# Altium PCB ZAS_SYM_PCB.PcbDoc
Units mil, origin at the board's own origin, x right, y up, seen from the top; angles counter-clockwise.
Board outline 2380 x 1505 mil, 2 copper layers (Top Layer, Bottom Layer); 24 components, 10 nets, 56 pads, 0 vias.
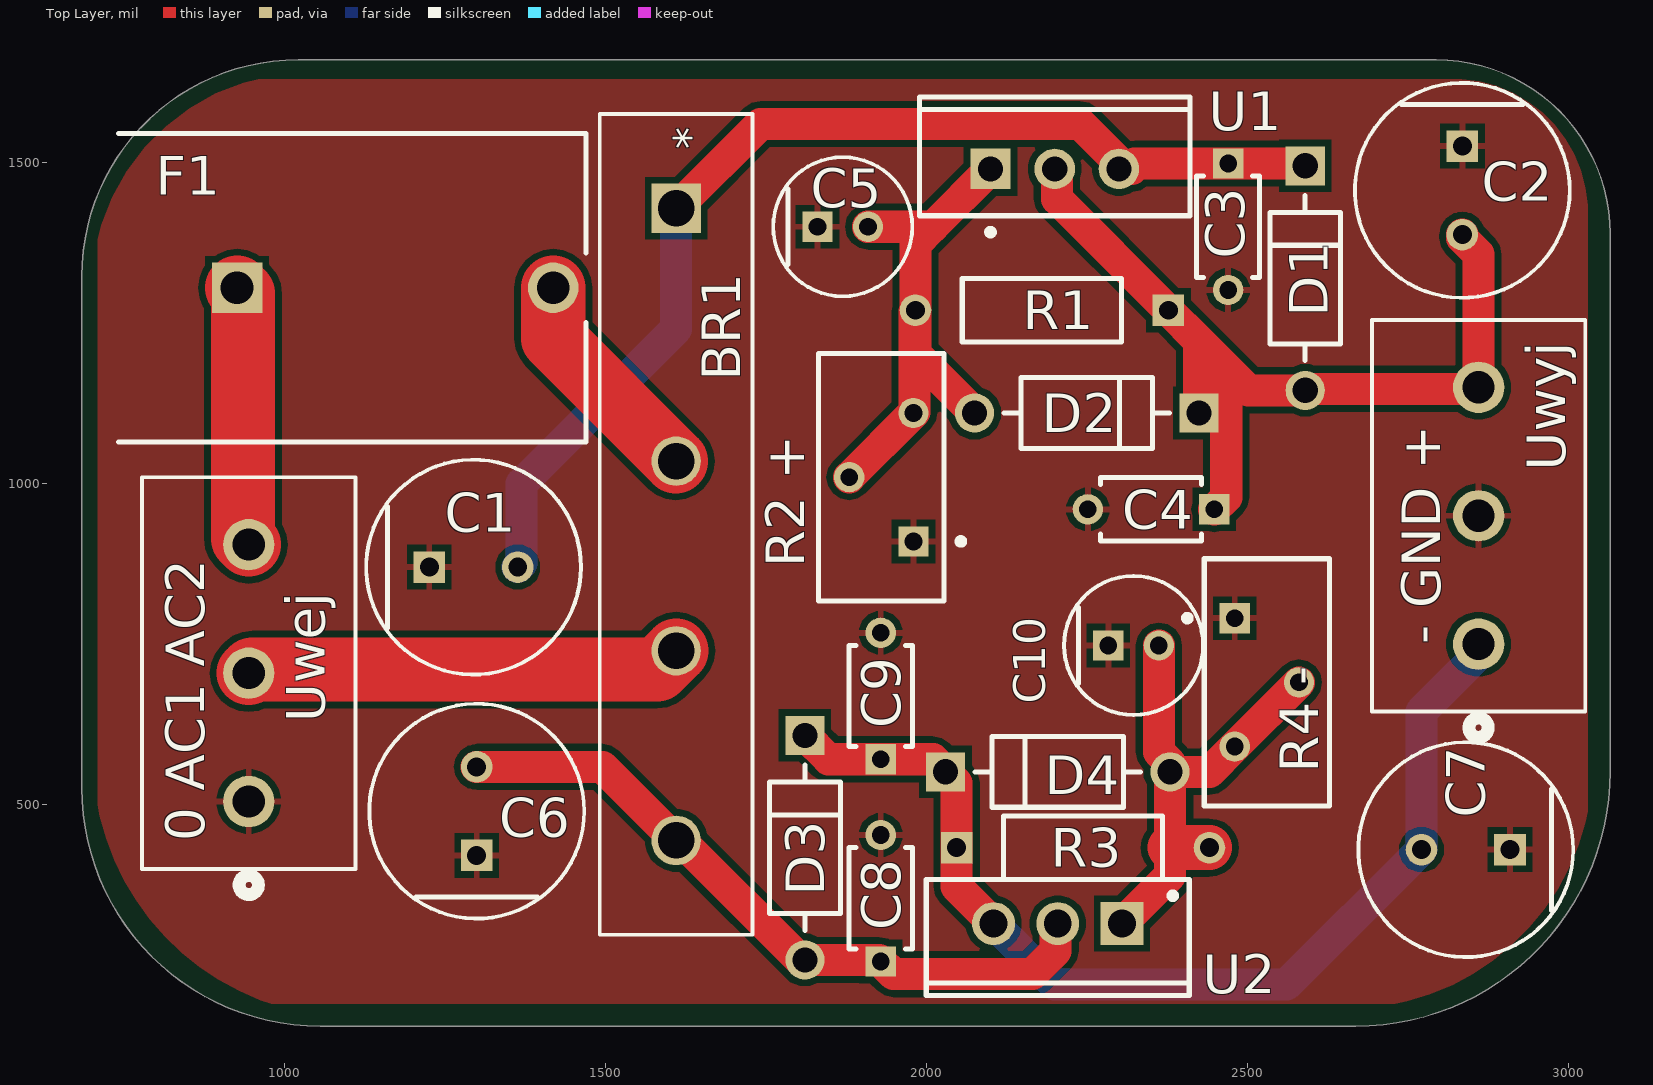
[diagram p0: Top Layer view]
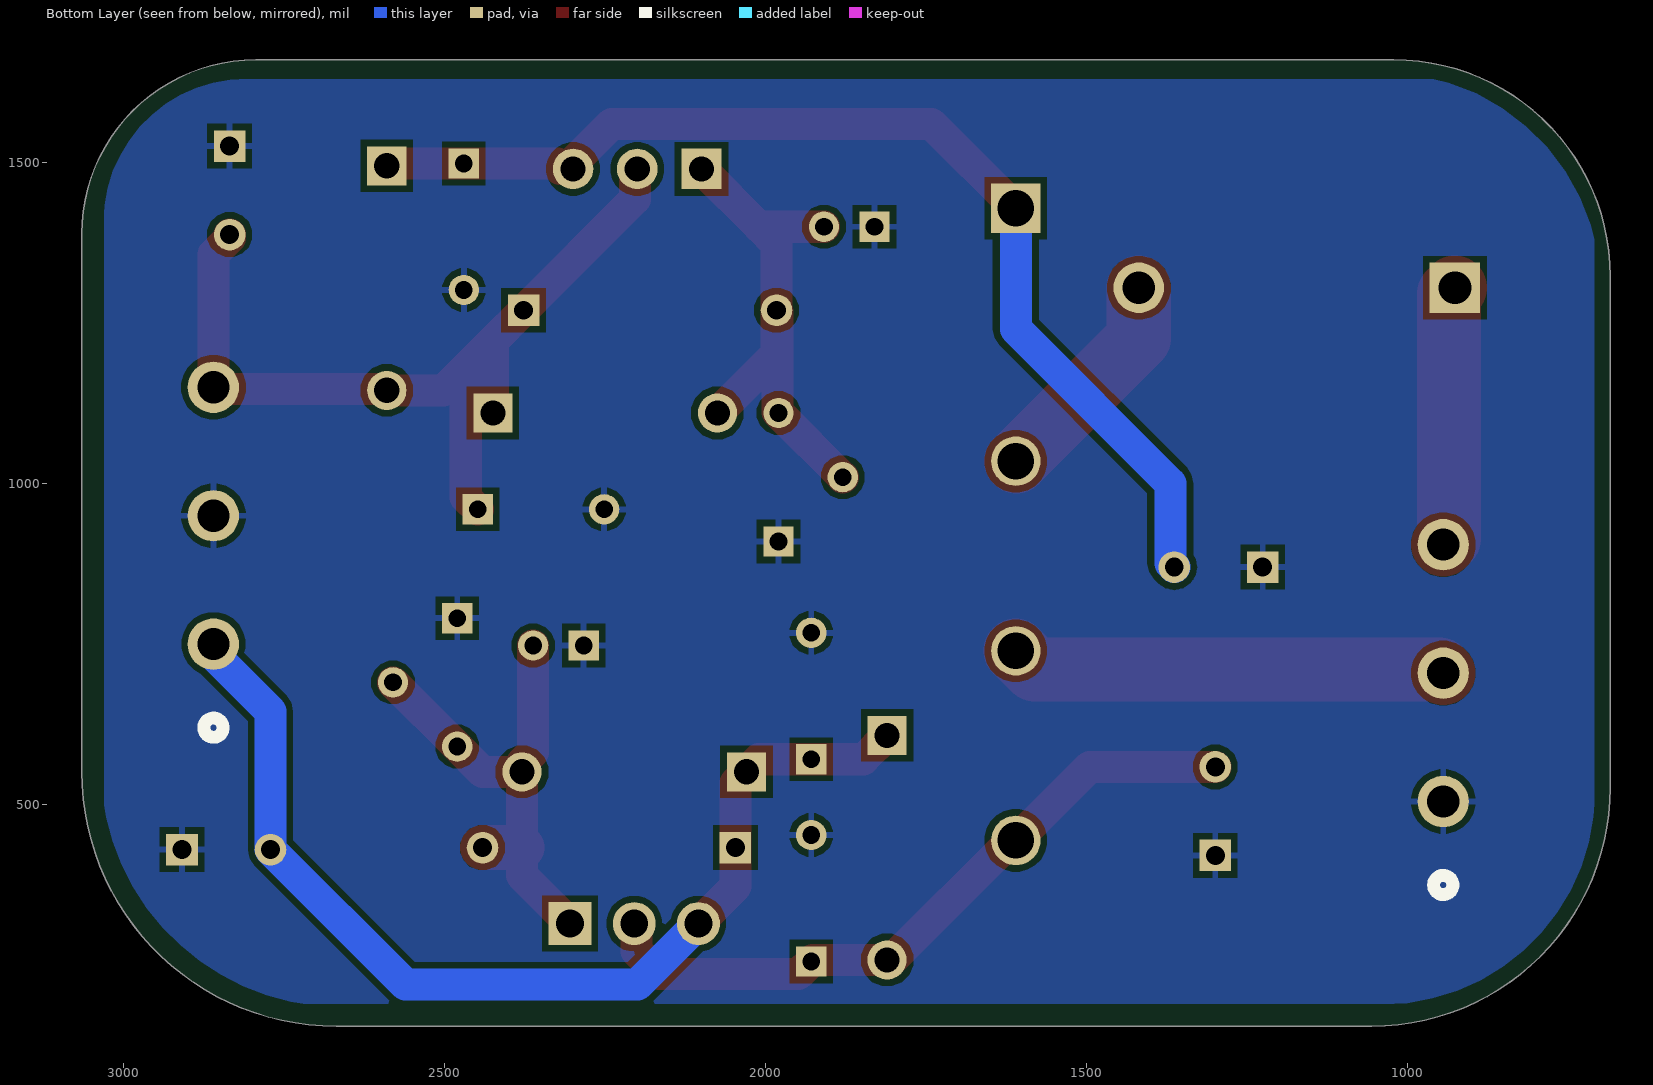
[diagram p1: Bottom Layer view, seen from below]
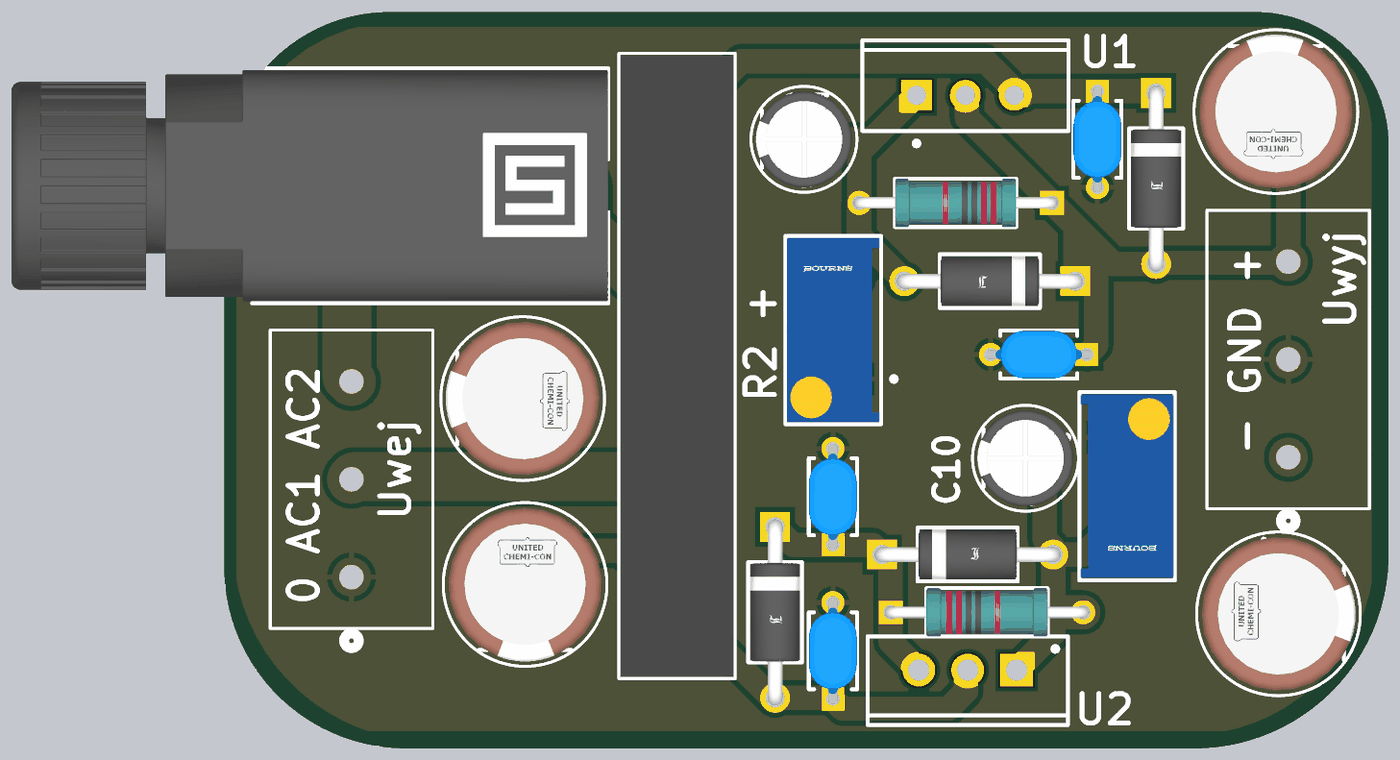
[diagram p2: 3D render of the assembled board from above, using the file's embedded part models]

## Layer stack, top to bottom
Top Solder: solder mask 0.4, Solder Resist, Dk 3.5
Top Layer: signal copper 1.4
Dielectric 1: dielectric 12.6, FR-4, Dk 4.8
Bottom Layer: signal copper 1.4
Bottom Solder: solder mask 0.4, Solder Resist, Dk 3.5

## Board outline
685,526.49 685,1323.09 cw(c1021.91,1323.09) 1021.91,1660 2793.87,1660 cw(c2793.87,1388.87) 3065,1388.87 3065,551.55 cw(c2668.45,551.55) 2668.45,155 1056.49,155 cw(c1056.49,526.49)

## Design rules (kind name [scope] priority, off if disabled: settings)
Clearance [All] p1: gap=10 ignorepadtopadclearanceinfootprint=FALSE
PolygonConnect [All] p1: connectstyle=Relief reliefconductorwidth=10 reliefentries=4 polygonreliefangle="90 Angle" airgapwidth=10
RoutingVias [All] p1: holewidth=28 width=50 viastyle="Through Hole" minholewidth=28 minwidth=50 maxholewidth=28 maxwidth=50
SolderMaskExpansion [All] p1: expansion=4 istentingtop=FALSE
Width [All] p1: maxlimit=10 minlimit=10 preferedwidth=10
30 further rules are at their usual default settings.

## Components (designator, comment, footprint, x,y, rotation, side; value= is the part's Value field where it differs from the comment)
BR1 "GBI10A" BxxC5000-3000ABxxC5000-3300A_DTC 1610.55,1428.7 r270 top
C1 "220uF" FP-KZN-H15-MFG 1295,870 r0 top
C2 "220uF" FP-KZN-H15-MFG 2834.65,1456.69 r270 top
C3 "100nF" FP-RDE0M1-MFG 2470,1400 r270 top
C4 "100nF" FP-RDE0M1-MFG 2350,960 r180 top
C5 "10uF" FP-RAD-TH-D_5_0_5-L_11_1-MFG 1870,1400 r0 top
C6 "220uF" FP-KZN-H15-MFG 1300,490 r90 top
C7 "220uF" FP-KZN-H15-MFG 2840,430 r180 top
C8 "100nF" FP-RDE0M1-MFG 1929.13,354.33 r90 top
C9 "100nF" FP-RDE0M1-MFG 1929.13,669.29 r90 top
C10 "10uF" FP-RAD-TH-D_5_0_5-L_11_1-MFG 2322.83,748.03 r0 top
D1 "1N4007" FP-1N4007-MFG 2590,1320 r270 top value=15pF
D2 "1N4007" FP-1N4007-MFG 2250,1110 r180 top value=15pF
D3 "1N4007" FP-1N4007-MFG 1811.02,433.07 r270 top value=15pF
D4 "1N4007" FP-1N4007-MFG 2204.72,551.18 r0 top value=15pF
F1 "0031.3501" FP-0031_3501-MFG 860,1305 r0 top
R1 "120" FP-MBB0207-MFG 2180,1270 r180 top
"R2 +" "2k" FP-3296Y-MFG 1929.8,1010 r0 top (schematic designator R2)
R3 "120" FP-MBB0207-MFG 2244.09,433.07 r0 top
"R4 -" "2k" FP-3296Y-MFG 2530.51,690.55 r180 top (schematic designator R4)
U1 "LM317" NDE0003A 2200,1490 r0 top
U2 "LM337" TO220 2204.72,314.96 r180 top
Uwej "282837-3" 282837-3_TYC 945,505 r90 top
Uwyj "282837-3" 282837-3_TYC 2860,750 r90 top

## Footprints (in the part's own frame and the unit in brackets; to place one, negate y for a bottom-side part, rotate by r counter-clockwise, add the part's x,y. Pads: shape width x height; smd on the part's side, far side on the other; paste and mask are expansions set on the pad)
282837-3_TYC [mil]
  round 80 / inner round 60 / far side round 80 hole 50 paste-99999 mask-40: 1(0,0) 2(200,0) 3(400,0)
  silkscreen extent -145,-166 505,166
BxxC5000-3000ABxxC5000-3300A_DTC [mil]
  rect 77x77 / inner round 60 / far side rect 77x77 hole 57 paste-99999 mask+0: 1(0,0)
  round 77 / inner round 60 / far side round 77 hole 57 paste-99999 mask+0: 2(393.7,0) 3(688.98,0) 4(984.25,0)
  silkscreen extent -147,-119 1131,119, body extent -142,-114 1126,114, height 677
FP-1N4007-MFG [mm]
  rect 1.55x1.55 hole 1 paste-2539.97 mask+0: 1(-4.44,0)
  round 1.55 hole 1 paste-2539.97 mask+0: 2(4.44,0)
  silkscreen extent -3.26,-1.4 3.26,1.4, body extent -5.32,-1.5 5.32,1.5, height 0.25
FP-0031_3501-MFG [mm]
  rect 2x2 hole 1.3 paste-2539.97 mask+0: 1(1.7,0)
  round 2 hole 1.3 paste-2539.97 mask+0: 2(14.2,0)
  silkscreen extent -3,-6.1 15.5,6.1, body extent -15.6,-6.2 15.6,6.2, height 0.25
FP-3296Y-MFG [mm]
  rect 1.2x1.2 hole 0.7 paste-2539.97 mask+0: 1(1.275,-2.54)
  round 1.2 hole 0.7 paste-2539.97 mask+0: 2(-1.265,0) 3(1.275,2.54)
  silkscreen extent -2.48,-4.89 3.27,4.89, body extent -2.58,-4.99 2.58,4.99, height 0.25
FP-KZN-H15-MFG [mm]
  rect 1.25x1.25 hole 0.75 paste-2539.97 mask+0: 1(-1.75,0)
  round 1.25 hole 0.75 paste-2539.97 mask+0: 2(1.75,0)
  silkscreen extent -4.25,-4.25 4.25,4.25, body extent -4.35,-4.35 4.35,4.35, height 0.25
FP-MBB0207-MFG [mm]
  rect 1.25x1.25 hole 0.75 paste-2539.97 mask+0: 1(-5,0)
  round 1.25 hole 0.75 paste-2539.97 mask+0: 2(5,0)
  silkscreen extent -3.15,-1.25 3.15,1.25, body extent -5.72,-1.35 5.72,1.35, height 0.25
FP-RAD-TH-D_5_0_5-L_11_1-MFG [mm]
  rect 1.2x1.2 hole 0.7 paste-2539.97 mask+0: 1(-1,0)
  round 1.2 hole 0.7 paste-2539.97 mask+0: 2(1,0)
  silkscreen extent -2.75,-2.75 2.75,2.75, body extent -2.85,-2.85 2.85,2.85, height 0.25
FP-RDE0M1-MFG [mm]
  rect 1.2x1.2 hole 0.7 paste-2539.97 mask+0: 1(-2.5,0)
  round 1.2 hole 0.7 paste-2539.97 mask+0: 2(2.5,0)
  silkscreen extent -2,-1.25 2,1.25, body extent -3.2,-1.35 3.2,1.35, height 0.25
NDE0003A [mm] "FM, 3-Leads, Body 10.7x4.7mm, Pitch 2.54mm"
  rect 1.6x1.6 hole 1: 1(-2.54,0)
  round 1.6 hole 1: 2(0,0) 3(2.54,0)
  silkscreen extent -5.35,-2.62 5.35,2.85, body extent -5.4,-1.9 5.4,2.9, height 19.4
TO220 [mm] "TO, Thru-Hole, Vertical, Heatsink Mounted; 3 In-Line Leads; Pitch 2.54 mm"
  rect 1.7x1.7 hole 1.1: 1(-2.54,0)
  round 1.7 hole 1.1: 2(0,0) 3(2.54,0)
  silkscreen extent -5.2,-1.75 5.2,2.85, body extent -5.25,-1.8 5.25,2.9, height 19.7

## Part data
BR1: library part B80C5000-3300A, "No Description Available", Mfr_Name=Diotec
C1 C2 C6 C7: library part CMP-33768-000022-1, "CAP ALUM 220UF 20% 50V RADIAL", Capacitance=470uF, Case/Package=Radial, Max Operating Temperature=105°C, Package Quantity=1000, Ripple Current=1.6A, Tolerance=20%, Voltage Rating=25V, Diameter=8mm, Height=8mm, Height - Seated (Max)=0.65inch, Impedance=59mR, Lead Pitch=0.138inch, Lead/Base Style=Straight, Length=15mm, Life (Hours)=10000Hour, Mount="Through Hole", Packaging=Bulk, RoHS Compliant=Yes, Series=KZN, Termination=Radial, Voltage Rating (DC)=25V, Width=8mm
C3 C4 C8 C9: library part CMP-06035-051680-1, "Ceramic Capacitor 100nF ±10% 50V X7R Radial", Case/Package=Radial, Dielectric=X7R, Max Operating Temperature=125°C, Min Operating Temperature=-55°C, Package Quantity=2000, Resistor Type=Ceramic, Tolerance=10%, Voltage Rating=50V, Capacitance=100nF, Height=3.5mm, Height - Seated (Max)=0.236inch, Lead Diameter=0.5mm, Lead Free="Lead Free", Lead Pitch=0.197inch, Lead/Base Style=Kinked, Length=0.157inch, Mount="Through Hole", Packaging="Tape and Reel", Termination=Radial, Voltage Rating (DC)=50V, Width=3.5mm
C5 C10: library part CMP-05427-001989-1, "CAP ALUM 10UF 20% 5V RADIAL", Capacitance=22uF, Case/Package=Radial, ESR (Equivalent Series Resistance)=1.3R, Leakage Current=3uA, Max Operating Temperature=105°C, Min Operating Temperature=-55°C, Package Quantity=2000, Ripple Current=155mA, Tolerance=20%, Voltage Rating=50V, Contact Plating=Tin, Diameter=5mm, Features="General Purpose", Height=11mm, Height - Seated (Max)=0.472inch, Impedance=1.3R, Lead Diameter=0.5mm, Lead Pitch=0.197inch, Length=11mm, Life (Hours)=1000Hour, Mount="Through Hole", Packaging="Tape and Reel", Polarity=Polar, Radiation Hardening=No, RoHS Compliant=Yes, Series=FC, Termination=Radial, Voltage Rating (DC)=50V
D1 D2 D3 D4: library part CMP-123542-000001-1, "Rectifier diode 1000 V 1 A DO-41, ,", Capacitance=15pF, Forward Current=1A, Manufacturer=Diotec, Max Junction Temp=+175°C, Max Repetitive Reverse Voltage=1000V, Max Surge Forward Current=27A, Peak Reverse Current=5uA, Temperature="-50°C to +175°C", Temperature Range Low=-50°C, Automotive=No, Category=Diode, ComponentLink2Description=Datasheet, ComponentLink2URL=https://datasheet.octopart.com/1N4007-Diotec-datasheet-62346875.pdf, Device Class L1="Discrete Semiconductors", Device Class L2=Diodes, Device Class L3="Rectifier Diodes", Height=2.8mm, Ipc Land Pattern Name=DIOAD888W100L520D280, Lead Free=Yes, Manufacturer Part Number=1N4007, Octopart=https://octopart.com/1n4007-diotec-4040411, Package=1N4007, Reverse Voltage=1000V, RoHS=TRUE, Temperature Range High=+175°C
F1: library part CMP-26292-000003-1, "FUSE HOLDER CART 250V 6.3A PCB", Ambient Temperature Range High=+85°C, Ambient Temperature Range Low=-40°C, Fuse Current=6.3A, Manufacturer=Schurter, Package=0, Voltage Rating Ac=250V, Automotive=No, Category=Fuse, ComponentLink2Description=Datasheet, ComponentLink2URL=https://us.schurter.com/bundles/snceschurter/epim/_ProdPool_/newDS/en/typ_FAS.pdf, Conn Orientation="Right Angle", Device Class L1="Circuit Protection", Device Class L2="Fuse Holders", Device Class L3=unset, Digikey Description="FUSE HOLDER CART 250V 6.3A PCB", Height=10mm, Lead Free=Yes, Manufacturer Part Number=0031.3501, Mouser Description="Fuse Holder FAS F'GRIP/SLOT", Number Of Fuses=1, Octopart=https://octopart.com/0031.3501-schurter-742824, RoHS=TRUE, Voltage Rating Dc=250V
R1 R3: library part CMP-02408-000026-1, "RES120 ohm", Case/Package=Axial, Max Operating Temperature=155°C, Max Power Dissipation=600mW, Min Operating Temperature=-55°C, Resistance=620R, Resistor Type="Metal Film", Temperature Coefficient=50ppm/°C, Tolerance=1%, Construction=Cylindrical, Contact Plating=Tin, Diameter=2.5mm, Features="Automotive AEC-Q200", Lead Free="Lead Free", Length=6.5mm, Military Standard=Not, Mount="Through Hole", Number of Terminations=2, Packaging="Tape and Reel", Power Rating=600mW, Radiation Hardening=No, RoHS Compliant=Yes, Series="MBB 0207 - Professional", Technology="THIN FILM", Termination=Axial
"R2 +" "R4 -": library part CMP-07234-000015-2, "TRIMMER 10K OHM 0.5W PC PIN TOP", Color=Blue, Insulation Resistance=1GR, Manufacturer Series=3296, Max Operating Temperature=125°C, Max Power Dissipation=500mW, Min Operating Temperature=-55°C, Package Quantity=50, Resistance=10kR, Resistance Law=Linear, Resistance Tolerance=10%, Resistor Type=Cermet, Temperature Coefficient=100ppm/°C, Actuator Orientation=Vertical, Actuator Type=SCREW, Depth=4.83mm, Height=0.395inch, Lead Free="Lead Free", Length=9.53mm, Military Standard=Not, Mount=Panel, Number of Pins=3, Number of Terminals/Pins=3, Number of Turns=25, Packaging=Rail/Tube, Power Rating=500mW, Radiation Hardening=No, REACH SVHC="No SVHC", RoHS Compliant=Yes, Series=3296, Taper=Linear, Technology=CERMET, Terminal Finish=Tin, Termination=Pin, Tolerance=10%, Type=Potentiometer, Weight=0.03oz, Width=9.53mm
U1: library part CMP-0062-02456-3, "3-Terminal Adjustable Regulator, 3-pin TO-220", Manufacturer="Texas Instruments", PackageTopMarking="NSUZXYTTE#*LM317T P+", PowerWise=N, ComponentLink1Description="Datasheet URL", ComponentLink1URL=http://www.ti.com/general/docs/lit/getliterature.tsp?genericPartNumber=LM317-N&fileType=pdf, CompType="LDO IC", PackageDescription="TO-220, Molded, 3 Lead, Straight", PackageReference=NDE0003A, PinCount=3, RoHS=N
U2: library part CMP-0244-00420-1, "Three-Terminal Negative Voltage Regulator, 3-Pin TO-220", ComponentLink1Description="Manufacturer URL", ComponentLink1URL=http://www.st.com, ComponentLink2Description=Datasheet, ComponentLink2URL=http://www.st.com/internet/com/TECHNICAL_RESOURCES/TECHNICAL_LITERATURE/DATASHEET/CD00000468.pdf, ComponentLink3Description="Package Specification", ComponentLink3URL=http://www.st.com/internet/com/TECHNICAL_RESOURCES/TECHNICAL_LITERATURE/PACKAGE_INFORMATION/CD00004649.pdf, DatasheetVersion=1/10/2011, PackageDescription="TO, Thru-Hole, Vertical, Heatsink Mounted; 3 In-Line Leads; Pitch 2.54 mm", PackageReference=TO220, PackageVersion=ver3.0
Uwej: Mfr_Name="TE Connectivity", RefDes=RefDes, Type=Type
Uwyj: "No Description Available", Mfr_Name="TE Connectivity", RefDes=RefDes, Type=Type

## Nets (pads, with @x,y where several pads share a name; then routed paths per layer and width w, separated by ;. In a path a pad name is that pad's centre, name@x,y a point inside that pad or via, vN(x,y) a via of type N, cw(c..) or ccw(c..) an arc to the next point about the centre after c; other vN are vias at no path point)
GND: "R2 +.1" "R4 -.1" C1.1 C2.1 C3.2 C4.2 C5.1 C6.1 C7.1 C8.2 C9.2 C10.1 Uwej.1 Uwyj.2
NetBR1_1: BR1.1 C1.2 C3.1 D1.1 U1.3 | length 1738.4
  Top Layer w50: BR1.1@1610,1430 1610.55,1429.45 BR1.1 1741.85,1560 2240,1560 2300,1500 U1.3 2320,1490 2320,1493.95 2324.48,1498.43 C3.1 2586.38,1498.43 D1.1
  Bottom Layer w50: C1.2 1370,876.1 1370,1000 1610.55,1240.55 BR1.1
NetBR1_2: BR1.2 F1.2 | length 349.1
  Top Layer w100: F1.2 1419.06,1225.94 BR1.2@1610,1035
NetBR1_3: BR1.3 Uwej.2 | length 679.9
  Top Layer w100: Uwej.2 950.44,710.44 1581.26,710.44 BR1.3
NetBR1_4: BR1.4 C6.2 C8.1 D3.2 U2.2 | length 1094.1
  Top Layer w50: C6.2 1496.1,558.9 BR1.4 1617.7,444.45 1803.88,258.27 D3.2 1926.77,258.27 1948.82,236.22 2165.35,236.22 2201.49,272.35 2201.49,311.72 U2.2
NetC2_2: C2.2 C4.1 D1.2 D2.1 R1.1 U1.2 Uwyj.3 | length 1417.1
  Top Layer w50: U1.2 2203.35,1486.65 2203.35,1443.5 R1.1 2424.8,1222.05 ; D2.1 2424.8,1222.05 ; C4.1 2467.05,978.62 2467.05,1177.05 2468.43,1178.43 ; C2.2 2834.65,1382.49 2860,1357.14 Uwyj.3 2857.6,1147.6 2592.4,1147.6 D1.2 2501.65,1145.2 2468.43,1178.43 ; 2424.8,1222.05 2468.43,1178.43
NetC5_2: "R2 +.2" "R2 +.3" C5.2 D2.2 R1.2 U1.1 | length 869.9
  Top Layer w50: 1880,1010 1980,1110 1981.57,1111.57 1981.57,1268.43 R1.2 ; C5.2 2010,1400 ; D2.2 1983.15,1202.05 R1.2 ; U1.1 2010,1400 ; R1.2 1983.15,1373.15 2010,1400
NetC7_2: C7.2 C9.1 D3.1 D4.1 R3.1 U2.3 Uwyj.1 | length 1662.9
  Top Layer w50: D3.1 1848.03,570.87 C9.1 2010.24,570.87 D4.1 2047.24,533.86 R3.1 2047.24,372.44 U2.3
  Bottom Layer w50: U2.3 2199.68,220 2561.1,220 C7.2 2771.1,645.12 Uwyj.1@2874.02,748.03
NetC10_2: "R4 -.2" "R4 -.3" C10.2 D4.2 R3.2 U2.1 | length 790.9
  Top Layer w50: U2.1 2379.67,389.9 2379.67,433.07 D4.2@2379.67,551.04 ; C10.2 2362.2,582.31 2379.53,564.99 D4.2 2440.94,551.18 2480.32,590.55 2580.32,690.55
  Top Layer w70: 2379.67,433.07 R3.2
NetF1_1: F1.1 Uwej.3 | length 407.5
  Top Layer w100: F1.1 936,1295.93 936,914 Uwej.3

## Polygon pours and split planes (outlines as drawn)
GND on Bottom Layer "GND_L02_P000" (solid, pour order 0): 1021.49,190 2720,190 ccw(c2660,560) 3030,500 3030,1420 ccw(c2807.5,1407.5) 2820,1630 960,1630 ccw(c1039.29,1300.71) 710,1380 710,501.49 ccw(c1041.09,521.09)
GND on Top Layer "GND_L01_P001" (solid, remove dead copper, pour order 1): 710,1380 710,500 ccw(c1108.92,574.86) 980,190 2730,190 ccw(c2652.78,567.22) 3030,490 3030,1420 ccw(c2820,1420) 2820,1630 960,1630 ccw(c1039.28,1300.72)

## Silkscreen, mask and mechanical layers (free items; w line width, h text height)
Top Overlay:
  text "- GND +" at 2800,750 h60 r90
  text "0 AC1 AC2" at 875.83,443.07 h60 r90
Mechanical 1:
  lines w50: 685,526.49 ccw(c1056.49,526.49) 1056.49,155 1105,155 2668.45,155 ccw(c2668.45,551.55) 3065,551.55 3065,1388.87 ccw(c2793.87,1388.87) 2793.87,1660 1021.91,1660 ccw(c1021.91,1323.09) 685,1323.09 685,526.49

## Text inside footprints (layer, text, board x,y; h text height)
BR1: Top 3D Body "*" at 1585.55,1573.07 h50 r270; Top Overlay "*" at 1585.55,1555 h50 r270